# Altium PCB PCB1.PcbDoc
Units mil, origin at the board's own origin, x right, y up, seen from the top; angles counter-clockwise.
Board outline 830 x 762.48 mil, 2 copper layers (Top Layer, Bottom Layer); 6 components, 7 nets, 28 pads, 5 vias.
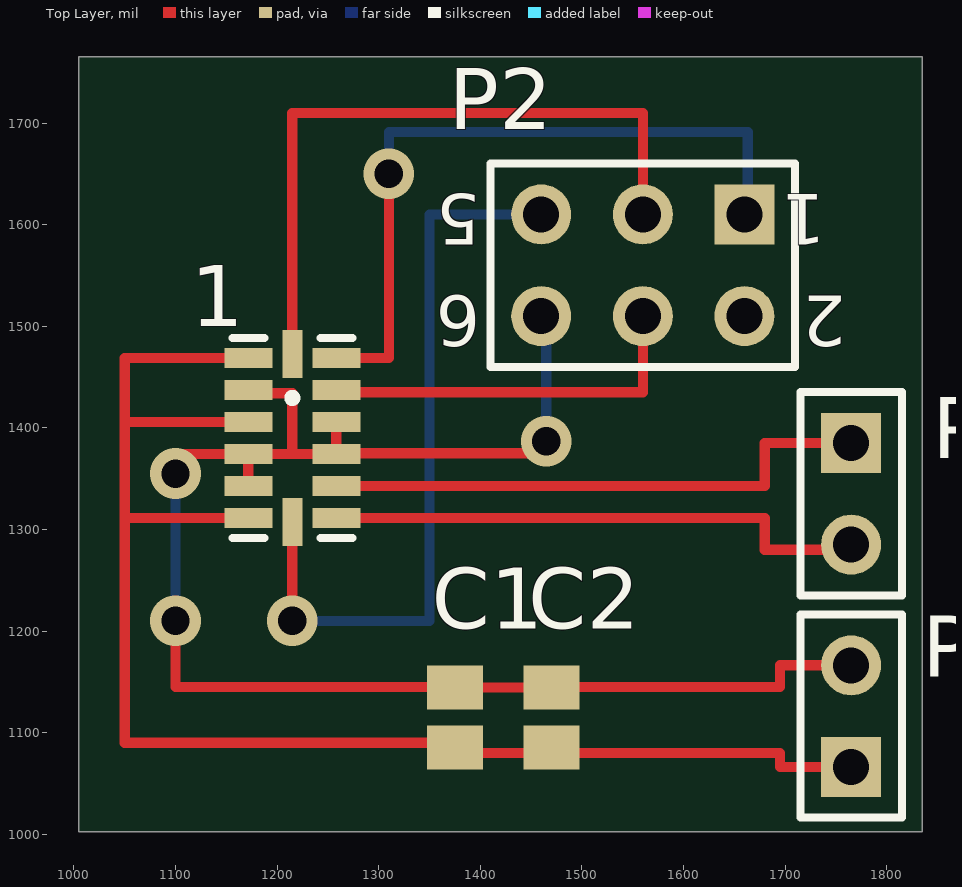
[diagram p0: Top Layer view]
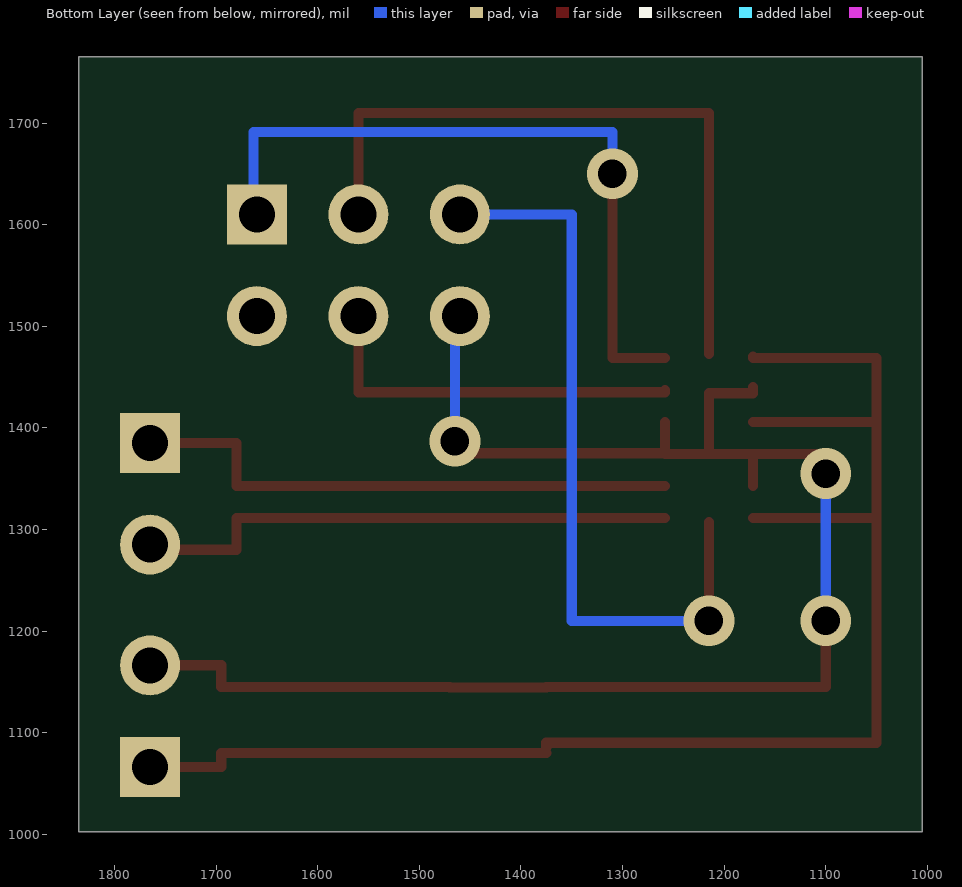
[diagram p1: Bottom Layer view, seen from below]

## Layer stack, top to bottom
Top Solder: solder mask 0.4, Solder Resist, Dk 3.5
Top Layer: signal copper 1.4
Dielectric 1: dielectric 12.6, FR-4, Dk 4.8
Bottom Layer: signal copper 1.4
Bottom Solder: solder mask 0.4, Solder Resist, Dk 3.5

## Board outline
1005,1002.52 1005,1765 1835,1765 1835,1002.52

## Design rules (kind name [scope] priority, off if disabled: settings)
Clearance [All] p1: gap=10
PolygonConnect [All] p1: connectstyle=Relief reliefconductorwidth=10 reliefentries=4 polygonreliefangle="90 Angle" airgapwidth=10
RoutingVias [All] p1: holewidth=28 width=50 viastyle="Through Hole" minholewidth=28 minwidth=50 maxholewidth=28 maxwidth=50
SolderMaskExpansion [All] p1: expansion=4
Width [All] p1: maxlimit=10 minlimit=10 preferedwidth=10
30 further rules are at their usual default settings.

## Components (designator, comment, footprint, x,y, rotation, side; value= is the part's Value field where it differs from the comment)
1 "LIS302DL" LGA14_LIS302DL(Primary) 1215,1390 r90 top
C1 "Cap" C0805 1375,1115 r90 top
C2 "Cap" C0805 1470,1115 r90 top
P1 "Power" HDR1X2 1765,1066.26 r90 top
P2 "SPI Header" HDR2X3 1660,1610 r180 top
P3 "Interrupt" HDR1X2 1765,1385 r270 top

## Footprints (in the part's own frame and the unit in brackets; to place one, negate y for a bottom-side part, rotate by r counter-clockwise, add the part's x,y. Pads: shape width x height; smd on the part's side, far side on the other; paste and mask are expansions set on the pad)
C0805 [mm] "Chip Capacitor, Body 2.0x1.3mm, IPC High Density"
  rect 1.1x1.4 smd: 1(-0.75,0) 2(0.75,0)
  body extent -1.1,-0.72 1.1,0.72, height 1.4
HDR1X2 [mm] "Connector; Header; 2 Position"
  rect 1.5x1.5 hole 0.9: 1(0,0)
  round 1.5 hole 0.9: 2(2.54,0)
  silkscreen extent -1.27,-1.27 3.81,1.27
HDR2X3 [mm] "Connector; Header; 3x2 Position"
  rect 1.5x1.5 hole 0.9: 1(0,0)
  round 1.5 hole 0.9: 2(0,2.54) 3(2.54,0) 4(2.54,2.54) 5(5.08,0) 6(5.08,2.54)
  silkscreen extent -1.27,-1.27 6.35,3.81
LGA14_LIS302DL(Primary) [mm]
  rect 0.5x1.2 smd paste-25.4 mask-25.4: 1(2,1.1) 2(1.2,1.1) 3(0.4,1.1) 4(-0.4,1.1) 5(-1.2,1.1) 6(-2,1.1) 8(-2,-1.1) 9(-1.2,-1.1) 10(-0.4,-1.1) 11(0.4,-1.1) 12(1.2,-1.1) 13(2,-1.1)
  rect 1.2x0.5 smd paste-25.4 mask-25.4: 7(-2.1,0) 14(2.1,0)
  silkscreen extent -2.5,-1.5 2.5,1.5

## Part data
C1 C2: library part "Cap Pol3", "Polarized Capacitor (Surface Mount)"
P1 P3: library part "Header 2", "Header, 2-Pin"
P2: library part "Header 3X2", "Header, 3-Pin, Dual row"

## Via types
v1: diameter 50, hole 28, Top Layer to Bottom Layer, 5 vias

## Nets (pads, with @x,y where several pads share a name; then routed paths per layer and width w, separated by ;. In a path a pad name is that pad's centre, name@x,y a point inside that pad or via, vN(x,y) a via of type N, cw(c..) or ccw(c..) an arc to the next point about the centre after c; other vN are vias at no path point)
Net1_1: 1.1 1.3 1.6 C1.1 C2.1 P1.1 | length 1478.3
  Top Layer w10: 1050,1311.26 1.6 ; 1050,1405.75 1.3 ; 1.1@1171.69,1470 1.1 1050,1468.74 1050,1090 1375,1090 C1.1 ; C1.1@1375,1080 1695,1080 1695,1066.26 P1.1
Net1_2: 1.2 1.4 1.5 1.10 1.11 C1.2 C2.2 P1.2 P2.6 | length 1593
  Top Layer w10: v1@1100,1230 v1(1100,1210) 1100,1145 C1.2@1375,1145 ; v1(1100,1355) 1100,1374.25 1.4 ; 1.5 1.4 ; 1.2@1171.69,1434.06 1215,1434.06 1215,1374.25 ; 1.2 1.2@1171.69,1440 ; 1.11 1.10@1258.31,1375 ; C1.2 C2.2 ; v1@1465,1391.69 1448.31,1375 1.10@1258.31,1375 ; C2.2@1470,1145 1695,1145 1695,1166.26 P1.2 ; 1.4 1215,1374.25 ; 1215,1374.25 1.10 1.10@1258.31,1375
  Bottom Layer w10: v1(1100,1210) v1(1100,1355) ; P2.6@1463.31,1505 1460,1501.69 1465,1496.69 v1@1465,1391.69
  other v1: 1465,1386.69
Net1_7: 1.7 P2.5 | length 745.6
  Top Layer w10: v1(1215,1210) 1.7
  Bottom Layer w10: v1(1215,1210) 1350,1210 1350,1610 P2.5@1463.31,1610
Net1_8: 1.8 P3.2 | length 533
  Top Layer w10: 1.8 1680,1311.26 1680,1280 P3.2@1760,1280
Net1_12: 1.12 P2.4 | length 378.9
  Top Layer w10: 1.12 1258.31,1435 1560,1435 P2.4
Net1_13: 1.13 P2.1 | length 708.8
  Top Layer w10: 1.13 1310,1468.74 v1(1310,1650)
  Bottom Layer w10: v1(1310,1650) 1310,1691.26 1663.31,1691.26 P2.1@1663.31,1610
Net1_14: 1.14 P2.3 | length 682.3
  Top Layer w10: 1.14 1215,1710 1560,1710 P2.3
pads on no net: 1.9 P2.2 P3.1
copper on no net: | length 543.9
  Top Layer w10: 1258.31,1342.76 1580,1342.76 1680,1342.76 1680,1385 1700,1385 1760,1385

## Text inside footprints (layer, text, board x,y; h text height)
P2: Top Overlay "6" at 1400,1530 h50 r180; Top Overlay "5" at 1400,1630 h50 r180; Top Overlay "2" at 1760,1530 h50 r180; Top Overlay "1" at 1740,1630 h50 r180